# Allegro board frontend.brd
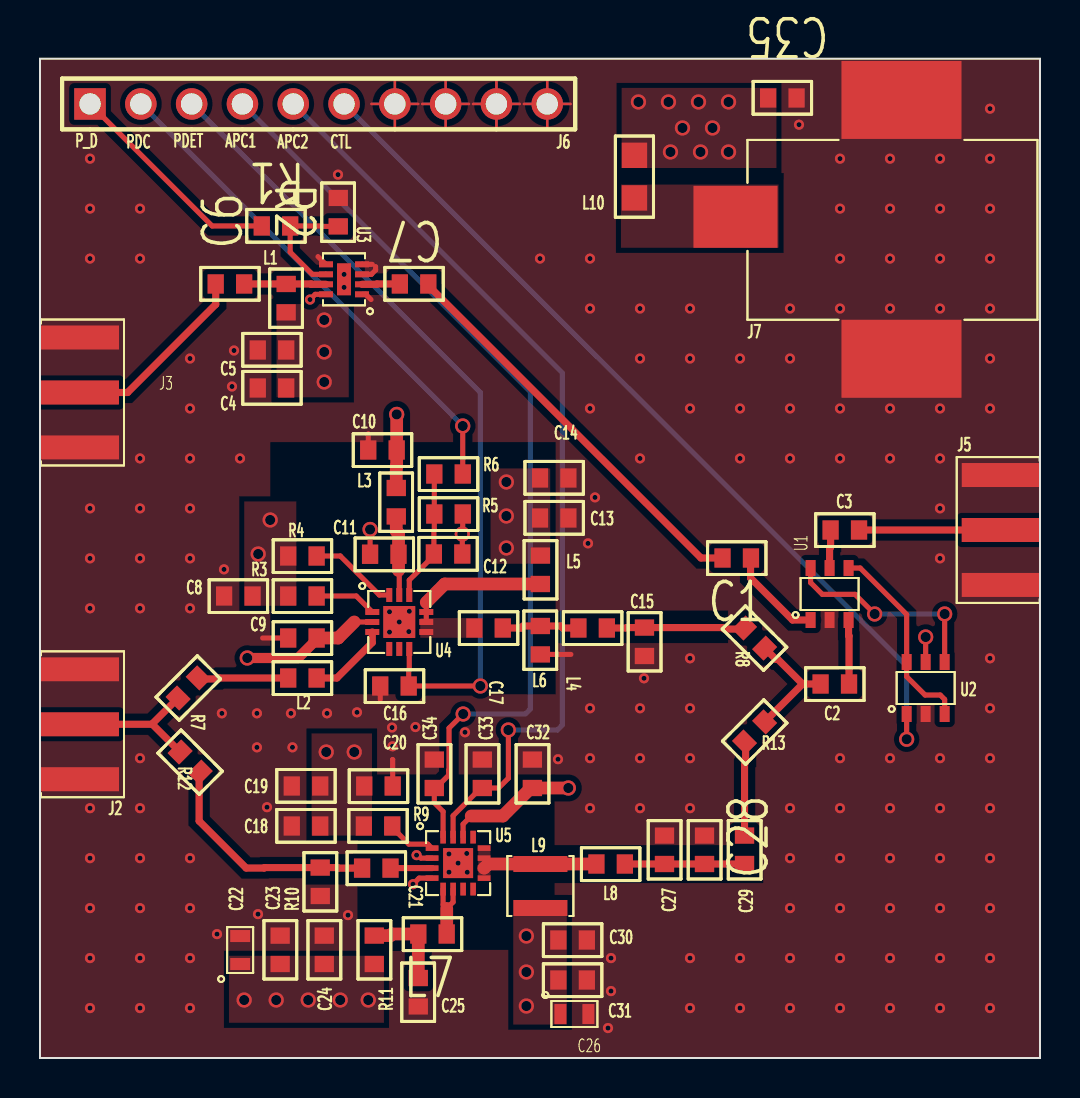
[diagram p0: board, top side]
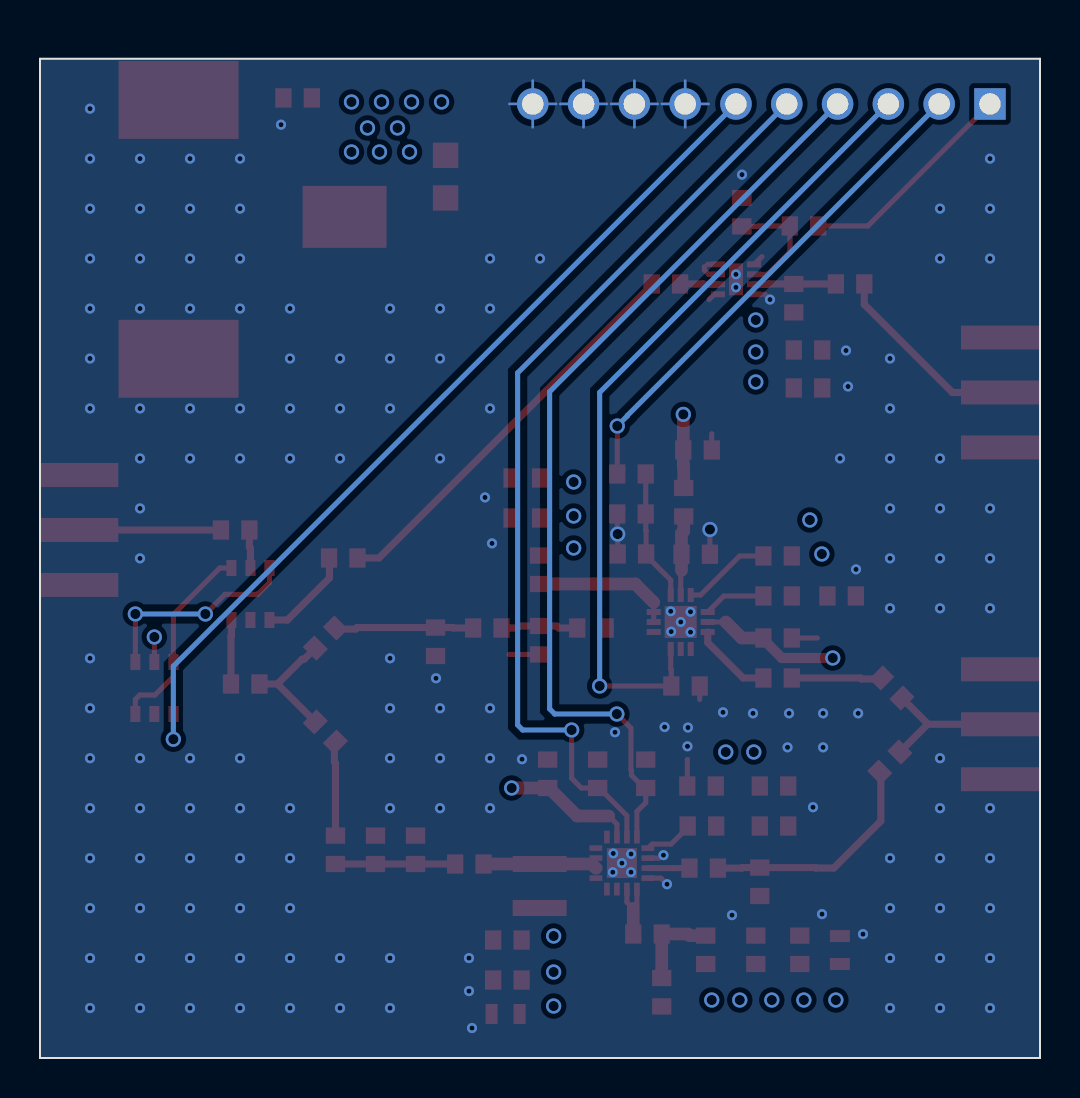
[diagram p1: board, bottom side, seen from below]

Outline 50 x 50 mm; copper layers: TOP, LAYER_1, LAYER_2, BOTTOM. Coordinates in mm from the lower left corner of the outline.
Outline path: 0,50 50,50 ; 0,50 0,0 ; 0,50 0,0 ; 0,50 50,50 ; 50,50 50,0 ; 50,50 50,0 ; 0,0 50,0 ; 0,0 50,0

## Design rules (mm)
constraint set DEFAULT: min track width 0.127

## Placement (name value [footprint] x y rotation side)
C1  100p  [SMC0603]  34.13 25.02 0 top
C2  100p  [SMC0603]  39.03 18.71 0 top
C3  100p  [SMC0603]  39.53 26.42 0 top
C4  1u  [SMC0603]  12.31 33.53 180 top
C5  100p  [SMC0603]  12.31 35.43 180 top
C6  100p  [SMC0603]  10.21 38.73 180 top
C7  100p  [SMC0603]  19.41 38.73 180 top
C8  1u  [SMC0603]  9.21 23.12 0 top
C9  100p  [SMC0603]  12.41 21.02 0 top
C10  1u  [SMC0603]  16.41 30.42 0 top
C11  2.4p  [SMC0603]  16.5 25.21 0 top
C12  100p  [SMC0603]  21.12 25.22 180 top
C13  1000p  [SMC0603]  26.42 27.02 180 top
C14  4.7u  [SMC0603]  26.42 29.02 180 top
C15  18p  [SMC0603]  30.22 20.12 90 top
C16  100p  [SMC0603]  17.01 18.61 0 top
C17  220p  [SMC0603]  21.72 21.52 0 top
C18  10n  [SMC0603]  14.01 11.61 180 top
C19  1n  [SMC0603]  14.01 13.61 180 top
C20  330p  [SMC0603]  16.21 13.61 0 top
C21  56p  [SMC0603]  16.1 9.5 0 top
C22  3.3u  [F921A335MPA]  10.01 4.7 90 top
C23  10n  [SMC0603]  12.01 4.7 90 top
C24  1n  [SMC0603]  14.21 4.7 90 top
C25  330p  [SMC0603]  18.91 4 270 top
C26  3.3u  [F921A335MPA]  26.02 2.2 0 top
C27  22p  [SMC0603]  31.22 9.71 90 top
C28  2p  [SMC0603]  33.23 9.71 90 top
C29  56p  [SMC0603]  35.23 9.71 90 top
C30  47p  [SMC0603]  25.92 5.9 0 top
C31  1n  [SMC0603]  25.92 3.9 0 top
C32  10n  [SMC0603]  24.62 13.51 90 top
C33  10n  [SMC0603]  22.12 13.51 90 top
C34  10n  [SMC0603]  19.71 13.51 90 top
C35  2.2U  [SMC0603]  37.83 48.04 180 top
J2  SMA_EDGE  [CON_SMA_EDGE]  2 16.7 0 top
J3  SMA_EDGE  [CON_SMA_EDGE]  2 33.3 0 top
J5  SMA_EDGE  [CON_SMA_EDGE]  48.04 26.42 180 top
J6  HEADER 10  [BCON_10X1V_100S_1SQ_42D]  2.5 47.74 0 top
J7  -  [PJ-036AH-SMT-TR]  34.77 42.09 180 top
L1  68n  [SMC0603]  12.31 38.73 270 top
L2  3.9n  [SMC0603]  12.41 19.01 0 top
L3  5.6n  [SMC0603]  17.81 28.52 270 top
L4  5.6n  [SMC0603]  26.92 21.52 0 top
L5  12n  [SMC0603]  25.02 23.72 90 top
L6  22n  [SMC0603]  25.02 21.62 270 top
L7  6.8n  [SMC0603]  18.91 6.2 0 top
L8  2.7n  [SMC0603]  27.82 9.71 0 top
L9  1u  [NR3012T1R0N]  25.02 9.71 270 top
L10  BLM21PG221SM1D  [SMC0805]  29.72 43.03 90 top
R1  33k  [SMC0603]  12.51 41.63 180 top
R2  10k  [SMC0603]  14.91 43.03 270 top
R3  1.8k  [SMC0603]  12.41 23.12 0 top
R4  2k  [SMC0603]  12.41 25.12 0 top
R5  1k  [SMC0603]  19.71 27.22 0 top
R6  1k  [SMC0603]  19.71 29.22 0 top
R7  0k  [SMC0603]  6.91 18.01 45 top
R8  0k  [SMC0603]  35.23 21.52 315 top
R9  18  [SMC0603]  17.61 11.61 180 top
R10  180  [SMC0603]  14.01 8.11 90 top
R11  0  [SMC0603]  16.71 4.7 90 top
R12  0  [SMC0603]  7.01 15.31 315 top
R13  0  [SMC0603]  35.23 15.81 45 top
U1  HMC544  [SOT26_6P]  38.53 21.92 90 top
U2  74LVC2G04  [SOT26_6P]  43.33 17.21 90 top
U3  TQP3M9036  [DFN2X2_8P]  16.1 38.21 180 top
U4  MMZ09332B  [QFN3X3_12P]  16.61 22.32 0 top
U5  RF5110G  [QFN_3X3_16P]  19.6 10.5 0 top

## Library data of the parts
C1-C17 C35 = C
C18-C21 C23-C25 C27-C34 = CAP NP
C22 C26 = CAP POL
J2 J3 J5 = SMA_EDGE
J6 = HEADER 10
J7 = PJ-036AH-SMT-TR
L1-L10 = INDUCTOR
R1-R8 = R
R9-R13 = RESISTOR
U1 = hmc544_0
U2 = 74AC04_0
U3 = TQP3M9036_2
U4 = MMZ09332BT1_3
U5 = RF5110G_1

## Footprints (pads in the part's own frame, mm; a bottom-side part is the same pattern mirrored in y, then rotated)
BCON_10X1V_100S_1SQ_42D
  rect 1.575x1.575 hole 1.067: 1(0,0)
  round 1.575 hole 1.067: 2(2.54,0) 3(5.08,0) 4(7.62,0) 5(10.16,0) 6(12.7,0) 7(15.24,0) 8(17.78,0) 9(20.32,0) 10(22.86,0)
CON_SMA_EDGE
  rect 3.9x1.2 smd: 1(0,0) 2(0,-2.75) 3(0,2.75)
DFN2X2_8P
  rect 0.7x0.3 smd: 1(0,0) 2(0,-0.5) 3(0,-1) 4(0,-1.5) 5(1.8,-1.5) 6(1.8,-1) 7(1.8,-0.5) 8(1.8,0)
  rect 0.7x1.6 smd: 9(0.9,-0.75)
F921A335MPA
  rect 0.6x1 smd: 1(0,0) 2(1.4,0)
NR3012T1R0N
  rect 0.8x2.7 smd: 1(0,0) 2(2.2,0)
PJ-036AH-SMT-TR
  rect 4.2x3.1 smd: 1(0,0)
  rect 6x3.9 smd: 2(-8.3,7.1) 3(-8.3,-5.85)
QFN3X3_12P
  rect 0.7x0.3 smd: 1(0,0) 2(0,-0.5) 3(0,-1) 7(2.7,-1) 8(2.7,-0.5) 9(2.7,0)
  rect 0.3x0.7 smd: 4(0.85,-1.85) 5(1.35,-1.85) 6(1.85,-1.85) 10(1.85,0.85) 11(1.35,0.85) 12(0.85,0.85)
  rect 1.6x1.6 smd: 13(1.35,-0.5)
QFN_3X3_16P
  rect 0.64x0.28 smd: 1(0,0) 2(0,-0.5) 3(0,-1) 4(0,-1.5) 9(2.6,-1.5) 10(2.6,-1) 11(2.6,-0.5) 12(2.6,0)
  rect 0.28x0.64 smd: 5(0.55,-2.05) 6(1.05,-2.05) 7(1.55,-2.05) 8(2.05,-2.05) 13(2.05,0.55) 14(1.55,0.55) 15(1.05,0.55) 16(0.55,0.55)
  rect 1.5x1.5 smd: 17(1.3,-0.75)
SMC0603
  rect 0.813x0.965 smd: 1(0,0) 2(1.422,0)
SMC0805
  rect 1.27x1.27 smd: 1(0,0) 2(2.134,0)
SOT26_6P
  rect 0.8x0.5 smd: 1(0,0) 2(0,-0.95) 3(0,-1.9) 4(2.6,-1.9) 5(2.6,-0.95) 6(2.6,0)

## Nets
GND: C4.2 C5.2 C8.1 C9.1 C10.1 C11.1 C12.1 C13.1 C14.1 C15.1 C16.1 C18.2 C19.2 C20.2 C22.2 C23.2 C24.2 C25.2 C26.2 C27.2 C28.2 C30.2 C31.2 C32.2 C33.2 C34.2 C35.1 J2.2 J2.3(SHEILD2) J3.2 J3.3(SHEILD2) J5.2 J5.3(SHEILD2) J6.7 J6.8 J6.9 J6.10 J7.2 J7.3(SHORT) L6.2 R2.1 R5.2 R10.1 U1.2 U2.2 U3.1 U3.3 U3.4 U3.5 U3.8 U3.9 U4.13 U5.2 U5.4 U5.17
VDD: C4.1 C5.1 C8.2 C9.2 C10.2 C13.2 C14.2 C18.1 C19.1 C20.1 C22.1 C23.1 C24.1 C26.1 C30.1 C31.1 C32.1 C35.2 L1.2 L3.1 L5.2 L9.2 L10.2 R3.1 R4.1 R9.2 R11.1 U2.5 U4.2 U5.14
APC1: C34.1 J6.4 U5.16
APC2: C33.1 J6.5 U5.15
CTL: J6.6 U2.1
P_D: J6.1 R1.2
PDC: J6.2 R6.2
PDET: C16.2 J6.3 U4.6
PWR_IN: J2.1 R7.1 R12.1
RF1: C1.1 C7.1
RF2: C2.1 R8.2 R13.2
RFC: C3.2 J5.1
N00403: U1.4 U2.3 U2.6
N00723: C1.2 U1.1
N00727: C2.2 U1.3
N00736: C3.1 U1.5(RFC)
N00740: U1.6 U2.4(Y)
N01696: R1.1 R2.2 U3.6(SHUT DOWN)
N01753: C7.2 U3.2
N01757: C6.1 L1.1 U3.7
N02051: C6.2 J3.1
N02570: C17.1 L5.1 U4.7 U4.8 U4.9
N02577: C17.2 L4.1 L6.1
N02623: C15.2 L4.2 R8.1
N02941: R3.2 U4.1
N02945: R4.2 U4.12
N03001: L2.2 U4.3
N03217: C11.2 L3.2 U4.11(VCC1)
N03319: C12.2 R5.1 R6.1 U4.10
N04309: R9.1 U5.1
N04313: C21.1 R10.2 R12.2
N04324: C21.2 U5.3
N04347: C25.1 L7.1 R11.2
N04360: L7.2 U5.5 U5.6(VCC2_2)
N04391: L8.1 L9.1 U5.9 U5.10 U5.11 U5.12
N04427: C27.1 C28.1 C29.1 L8.2
N08245: C29.2 R13.1
N11139: J7.1 L10.1
N024760: L2.1 R7.2

Pads without a net: U4 4 5; U5 7 8 13

## Via types
v1: diameter 0.762, hole 0.508, TOP to BOTTOM, 40 vias
v2: diameter 0.508, hole 0.254, TOP to BOTTOM, 165 vias

## Routing (per net, layer and track width the routed paths; a pad name or vN(x,y) marks a point on that pad's centre or on a via; arc(x,y) is an arc through that point)
GND: length 70.4
  TOP w0.127: 19.11,47.74 J6.8 ; J6.8 21.45,47.74 ; J6.8 20.28,46.57 ; J6.8 20.28,48.9 ; J6.9 23.99,47.74 ; J6.9 22.82,48.9 ; J6.9 21.65,47.74 ; J6.9 22.82,46.57 ; 16.57,47.74 J6.7 ; J6.7 17.74,46.57 ; J6.7 17.74,48.9 ; J6.7 18.91,47.74 ; 25.36,46.57 J6.10 ; J6.10 26.53,47.74 ; J6.10 25.36,48.9 ; J6.10 24.19,47.74
  TOP w0.254: U3.3 16.57,39.21 16.78,39.43 16.78,39.6 ; U3.5 14.29,39.71 13.9,40.1 ; U3.8 13.76,38.21 v2(13.5,37.95) ; 16.61,39.71 U3.4 ; C9.1 11.13,21.02 ; U5.4 18.95,9 v2(18.65,8.7) ; C20.2 17.63,14.93 17.63,14.94 ; 16.55,37.95 16.29,38.21 U3.1 ; U5.2 19.05,10 18.9,10.15 v2(18.83,10.15) ; L6.2 26.54,20.19 ; C10.1 16.41,31.24 ; R5.2 21.14,26.24 v1(21.12,26.22) C12.1 ; C16.1 17.01,17.94 ; C11.1 v1(16.5,26.45)
  LAYER_1 w0.127: 16.57,47.74 J6.7 ; J6.7 18.91,47.74 ; J6.7 17.74,46.57 ; J6.7 17.74,48.9 ; 25.36,46.57 J6.10 ; J6.10 25.36,48.9 ; J6.10 26.53,47.74 ; J6.10 24.19,47.74 ; J6.8 21.45,47.74 ; J6.8 19.11,47.74 ; J6.8 20.28,48.9 ; J6.8 20.28,46.57 ; J6.9 23.99,47.74 ; J6.9 21.65,47.74 ; J6.9 22.82,48.9 ; J6.9 22.82,46.57
  BOTTOM w0.127: 17.74,46.57 J6.7 ; J6.7 16.57,47.74 ; J6.7 18.91,47.74 ; J6.7 17.74,48.9 ; J6.10 26.53,47.74 ; J6.10 24.19,47.74 ; J6.10 25.36,48.9 ; J6.10 25.36,46.57 ; J6.9 23.99,47.74 ; J6.9 22.82,46.57 ; J6.9 22.82,48.9 ; J6.9 21.65,47.74 ; 19.11,47.74 J6.8 ; J6.8 21.45,47.74 ; J6.8 20.28,48.9 ; J6.8 20.28,46.57
  vias: v2(2.5,45) v2(2.5,42.5) v2(2.5,40) v2(2.5,27.5) v2(2.5,25) v2(2.5,22.5) v2(2.5,12.5) v2(2.5,10) v2(2.5,7.5) v2(2.5,5) v2(2.5,2.5) v2(5,42.5) v2(5,40) v2(5,30) v2(5,27.5) v2(5,25) v2(5,22.5) v2(5,15) v2(5,12.5) v2(5,10) v2(5,7.5) v2(5,5) v2(5,2.5) v2(7.5,35) v2(7.5,32.5) v2(7.5,30) v2(7.5,27.5) v2(7.5,25) v2(7.5,22.5) v2(7.5,10) v2(7.5,7.5) v2(7.5,5) v2(7.5,2.5) v2(8.85,6.2) v2(9.09,17.25) v2(9.2,24.45) v2(9.6,33.6) v2(9.7,35.4) v2(10,30) v2(10.85,17.25) v2(10.85,15.54) v2(10.9,7.2) v2(11.35,12.55) v2(12.55,17.25) v2(12.62,15.54) v2(14.35,17.25) v2(14.9,44.2) v2(15.2,39.21) v2(15.2,38.56) v2(15.4,7.15) v2(15.85,17.3) v2(17.48,22.33) v2(17.48,21.31) v2(17.6,16.54) v2(17.63,15.6) v2(17.96,21.82) v2(18.44,21.34) v2(18.47,22.35) v2(18.77,16.56) v2(20.45,10.21) v2(20.45,9.3) v2(20.9,9.75) v2(21.25,16.3) v2(21.34,10.24) v2(21.36,9.3) v2(25,40) v2(25.9,14.95) v2(27.4,25.75) v2(27.5,40) v2(27.5,37.5) v2(27.5,32.5) v2(27.5,17.5) v2(27.5,15) v2(27.5,12.5) v2(27.75,28.05) v2(28.4,1.5) v2(28.55,5) v2(28.55,3.35) v2(30,37.5) v2(30,35) v2(30,30) v2(30,17.5) v2(30,15) v2(30,12.5) v2(30.2,19) v2(32.5,37.5) v2(32.5,35) v2(32.5,32.5) v2(32.5,20) v2(32.5,17.5) v2(32.5,15) v2(32.5,12.5) v2(32.5,5) v2(32.5,2.5) v2(35,35) v2(35,32.5) v2(35,30) v2(35,5) v2(35,2.5) v2(37.5,37.5) v2(37.5,35) v2(37.5,32.5) v2(37.5,30) v2(37.5,12.5) v2(37.5,10) v2(37.5,7.5) v2(37.5,5) v2(37.5,2.5) v2(37.95,46.7) v2(40,45) v2(40,42.5) v2(40,40) v2(40,37.5) v2(40,32.5) v2(40,30) v2(40,15) v2(40,12.5) v2(40,10) v2(40,7.5) v2(40,5) v2(40,2.5) v2(42.5,45) v2(42.5,42.5) v2(42.5,40) v2(42.5,37.5) v2(42.5,32.5) v2(42.5,30) v2(42.5,15) v2(42.5,12.5) v2(42.5,10) v2(42.5,7.5) v2(42.5,5) v2(42.5,2.5) v2(45,45) v2(45,42.5) v2(45,40) v2(45,37.5) v2(45,32.5) v2(45,30) v2(45,27.5) v2(45,25) v2(45,15) v2(45,12.5) v2(45,10) v2(45,7.5) v2(45,5) v2(45,2.5) v2(47.5,47.5) v2(47.5,45) v2(47.5,42.5) v2(47.5,40) v2(47.5,37.5) v2(47.5,35) v2(47.5,32.5) v2(47.5,20) v2(47.5,17.5) v2(47.5,15) v2(47.5,12.5) v2(47.5,10) v2(47.5,7.5) v2(47.5,5) v2(47.5,2.5)
VDD: length 18.6
  TOP w0.254: 21.56,12.11 21.15,11.7 U5.14 ; 24.54,13.51 C32.1 ; 15.71,21.82 U4.2 ; U2.5 v1(44.28,21.07)
  TOP w0.508: C9.2 13.83,20.94 12.91,20.02 v1(10.36,20.02)
  TOP w0.635: 21.56,12.11 23.14,12.11 24.54,13.51 ; 15.71,21.82 14.91,21.02 C9.2 ; v1(17.83,32.2) C10.2 17.83,29.61 17.81,29.59 L3.1 ; C32.1 v1(26.42,13.51)
  vias: v1(10.21,2.9) v1(10.91,25.22) v1(11.51,26.92) v1(11.81,2.9) v1(13.41,2.9) v1(14.21,36.93) v1(14.21,35.33) v1(14.21,33.83) v1(14.31,15.31) v1(15.01,2.9) v1(15.71,15.31) v1(16.41,2.9) v1(23.32,28.82) v1(23.32,27.12) v1(23.32,25.52) v1(24.32,6.1) v1(24.32,4.3) v1(24.32,2.6) v1(29.92,47.84) v1(31.42,47.84) v1(31.52,45.33) v1(32.12,46.54) v1(32.93,47.84) v1(33.03,45.33) v1(33.63,46.54) v1(34.43,47.84) v1(34.43,45.33)
APC1: length 46.7
  TOP w0.254: v1(21.16,17.21) 20.45,16.51 20.45,14.42 20.43,14.4 20.43,14.15 19.79,13.51 C34.1 19.71,12.77 20.15,12.33 U5.16
  BOTTOM w0.254: J6.4 24.52,33.34 24.52,17.47 24.26,17.21 v1(21.16,17.21)
APC2: length 46.5
  TOP w0.254: U5.15 20.66,12.12 22.04,13.51 C33.1 22.93,13.51 23.42,14 v1(23.42,16.41)
  BOTTOM w0.254: v1(23.42,16.41) 25.87,16.41 26.12,16.67 26.12,34.28 J6.5
CTL: length 44.7
  TOP w0.254: U2.1 v1(43.33,15.95)
  BOTTOM w0.254: v1(43.33,15.95) 43.33,19.61 J6.6
P_D: length 11.1
  TOP w0.254: R1.2 8.61,41.63 J6.1
PDC: length 25.2
  TOP w0.254: R6.2 v1(21.14,31.62)
  BOTTOM w0.254: v1(21.14,31.62) 20.63,32.13 20.63,32.14 J6.2
PDET: length 40.5
  TOP w0.254: U4.6 18.46,19.45 18.43,19.43 C16.2 v1(22.02,18.61)
  BOTTOM w0.254: J6.3 22.02,33.3 v1(22.02,18.61)
PWR_IN: length 7.4
  TOP w0.356: 5.62,16.7 R12.1 ; 5.62,16.7 J2.1 ; 5.62,16.7 5.62,16.73 R7.1
RF1: length 20.4
  TOP w0.356: C7.1 19.41,38.65 33.05,25.02 C1.1
RF2: length 6.2
  TOP w0.356: R8.2 36.79,19.95 36.89,19.95 38.13,18.71 ; 38.13,18.71 R13.2 ; 38.13,18.71 C2.1
RFC: length 7.1
  TOP w0.356: C3.2 J5.1
N00403: length 10.1
  TOP w0.254: U2.3 45.23,17.94 45.01,18.16 44.25,18.16 43.33,19.08 U2.6 43.33,22.19 41.01,24.52 U1.4
N00723: length 4.9
  TOP w0.356: U1.1 37.63,21.92 35.53,24.02 35.53,25 C1.2
N00727: length 3.2
  TOP w0.356: C2.2 40.45,21.11 40.43,21.14 U1.3
N00736: length 1.9
  TOP w0.356: C3.1 39.53,25.56 39.48,25.51 U1.5
N00740: length 10.5
  TOP w0.254: U1.6 38.53,23.79 39.12,23.2 40.75,23.2 v1(41.73,22.22) ; U2.4 v1(45.23,22.22)
  BOTTOM w0.254: v1(45.23,22.22) v1(41.73,22.22)
N01696: length 6
  TOP w0.254: U3.6 13.62,39.21 12.51,40.32 R1.1 14.08,41.63 14.1,41.61 R2.2
N01753: length 1.9
  TOP w0.356: C7.2 16.85,38.73 16.83,38.71 U3.2
N01757: length 4.1
  TOP w0.356: U3.7 13.57,38.71 13.55,38.73 L1.1 C6.1
N02051: length 9.6
  TOP w0.356: C6.2 8.79,37.71 4.38,33.3 J3.1
N02570: length 7.1
  TOP w0.254: 19.31,22.8 U4.9 U4.8
  TOP w0.635: L5.1 20.23,23.72 19.31,22.8
N02577: length 3.9
  TOP w0.356: C17.2 24.06,21.52 24.16,21.62 L6.1 26.03,21.62 26.13,21.52 L4.1
N02623: length 6.9
  TOP w0.356: R8.1 35.17,21.46 34.22,21.46 34.14,21.54 C15.2 29.36,21.54 29.34,21.52 L4.2
N02941: length 3.1
  TOP w0.254: U4.1 15.81,23.12 R3.2
N02945: length 4.4
  TOP w0.254: U4.12 16.97,23.17 15.01,25.12 R4.2
N03001: length 4
  TOP w0.356: L2.2 14.84,19.01 16.61,20.79 U4.3
N03217: length 4
  TOP w0.254: U4.11 17.96,24.36 17.93,24.39
  TOP w0.635: L3.2 17.81,26.36 17.93,26.25 C11.2 17.93,24.39
N03319: length 6.6
  TOP w0.254: U4.10 18.46,23.91 19.69,25.14 C12.2 19.69,26.39 19.71,26.41 R5.1 R6.1
N04309: length 2.5
  TOP w0.254: U5.1 19.59,10.5 19.39,10.7 18.45,10.7 17.61,11.53 R9.1
N04313: length 11.6
  TOP w0.356: R12.2 7.96,14.25 7.96,11.86 10.31,9.51 11.21,9.51 11.23,9.53 R10.2 14.87,9.53 14.9,9.5 C21.1
N04324: length 2.1
  TOP w0.305: U5.3 18.29,9.5 C21.2
N04347: length 4.4
  TOP w0.635: C25.1 L7.1 17.6,6.2 17.53,6.13 R11.2
N04360: length 3.4
  TOP w0.254: U5.6 20.66,7.8 20.34,7.48 20.34,7.48 20.15,7.67 U5.5
  TOP w0.635: 20.34,7.48 L7.2
N04391: length 5.7
  TOP w0.635: U5.10 22.41,9.71 L9.1 L8.1
N04427: length 6
  TOP w0.356: L8.2 C27.1 C28.1 C29.1
N08245: length 4.7
  TOP w0.356: R13.1 35.28,15.76 35.28,14.8 35.23,14.75 C29.2
N024760: length 4.5
  TOP w0.356: L2.1 8.97,19.01 8.92,18.97 7.96,18.97 R7.2

## Copper pours and planes (outline as drawn; the poured copper is in the pictures)
GND on TOP: 0.01,0.01 0.01,49.99 50.01,49.99 50.01,0.01 ; 6 cut-outs
GND on BOTTOM: 0.03,0 0.03,49.99 50.01,49.99 50.01,0
GND on LAYER_1: 0.66,0.66 0.66,49.7 49.66,49.7 49.66,0.66
VDD on TOP: 26.34,7.9 26.34,1.67 23.67,1.67 23.67,7.9
VDD on TOP: 29.08,44.53 29.08,48.54 36.82,48.54 36.82,44.53
VDD on TOP: 11.83,37.72 11.83,33.06 15.44,33.06 15.44,37.72
VDD on TOP: 16.6,11.13 16.6,16.24 13.58,16.24 13.58,11.13
VDD on TOP: 25.51,24.73 25.51,29.5 22.53,29.5 22.53,24.73
VDD on TOP: 17.2,5.11 17.2,1.76 9.45,1.76 9.45,5.11
VDD on TOP: 12.82,22.63 12.82,27.85 10.22,27.85 10.22,22.63
VDD on LAYER_2: 0.66,0.66 0.66,49.7 49.66,49.7 49.66,0.66
N02570 on TOP: 22.12,22.01 22.12,21.03 18.96,21.03 18.96,22.01
N04391 on TOP: 21.89,10.64 21.89,8.87 22.52,8.87 22.52,10.64
N11139 on TOP: 36.93,43.7 36.93,40.54 29.05,40.54 29.05,43.7

## Text on the board
Ref Des/Silkscreen Top: P_D | PDC | PDET | APC1 | APC2 | CTL
